# EAGLE board swarm-agg1a (EAGLE 4.16)
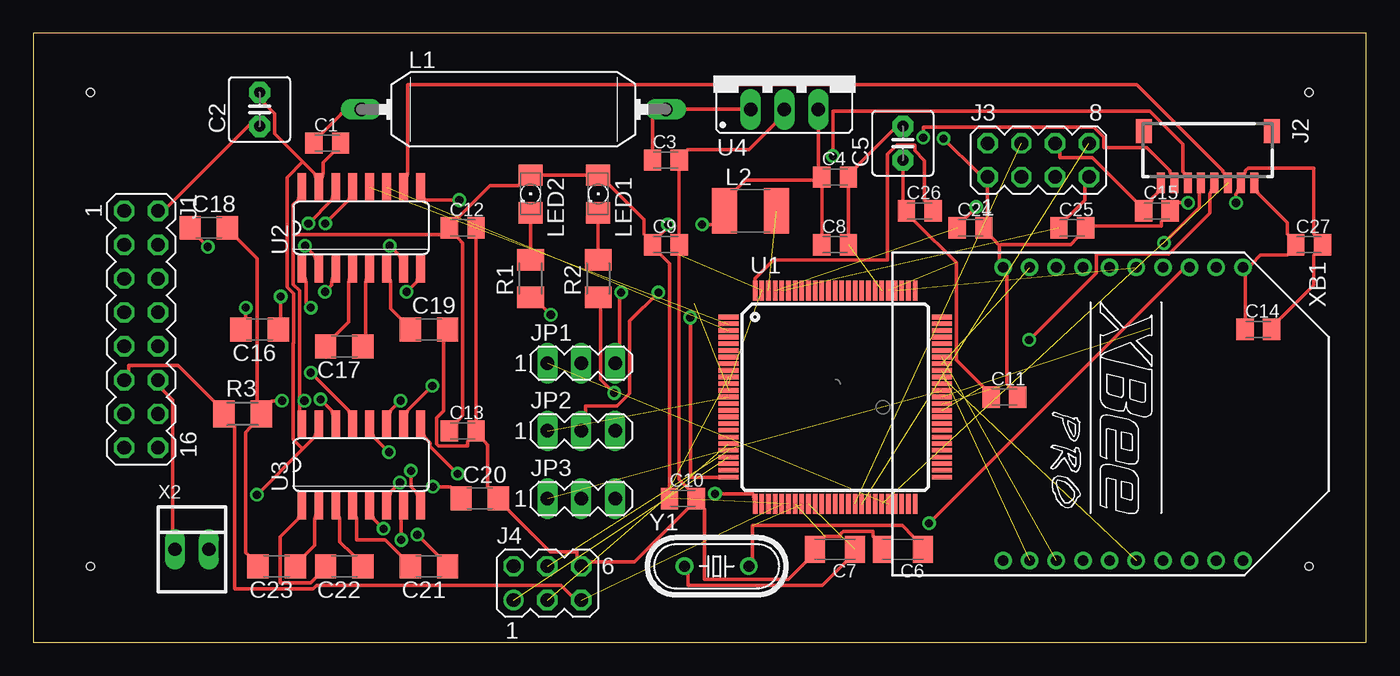
[diagram p0: board, top side]
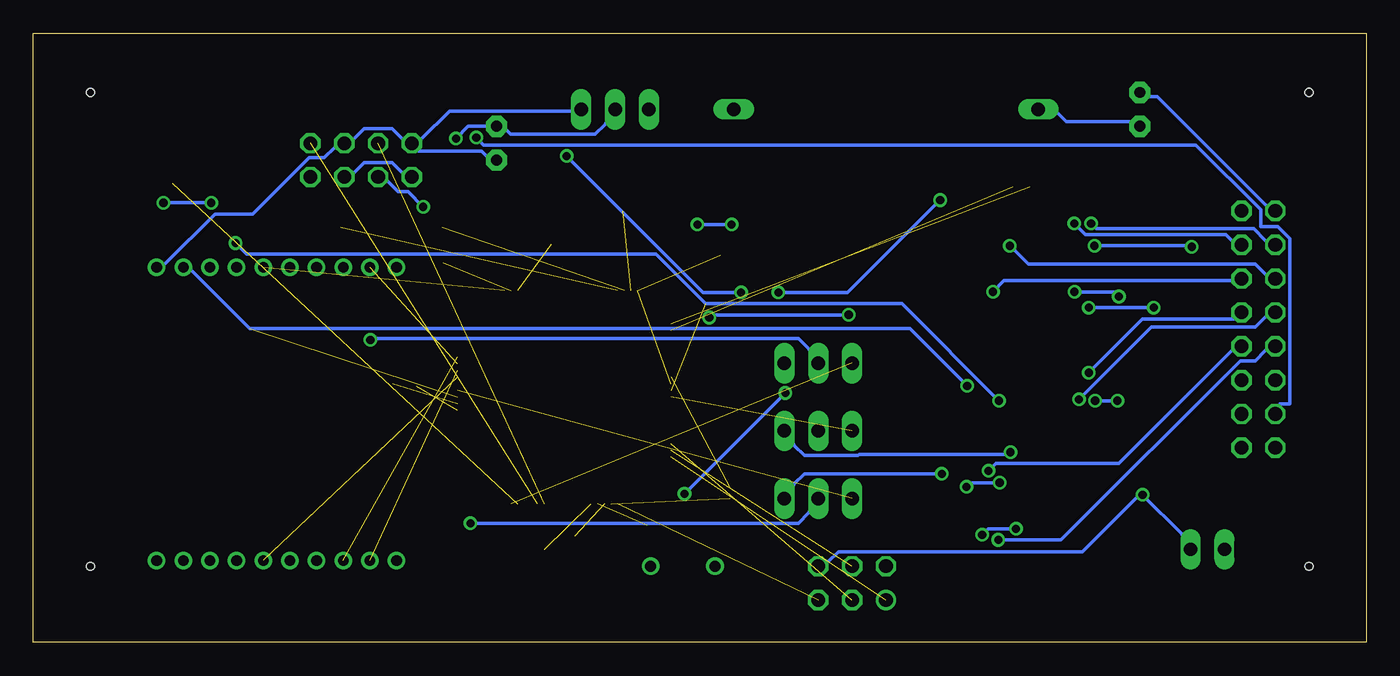
[diagram p1: board, bottom side, seen from below]

Size 100 x 45.71 mm. Coordinates in mm from the lower left corner, seen from the top.
Outline: 0,0 100,0 100,45.71 0,45.71 0,0
Copper layers (1*16): Top 0.035mm / dielectric 1.5mm / Bottom 0.035mm
Design rules "default": minimum track width 10mil, minimum drill 24mil, track to track 8mil, track to pad 8mil, pad to pad 8mil, via to via 8mil, smd to smd 8mil, copper to edge 40mil, drill to drill 8mil, minimum pad ring 10mil, minimum via ring 8mil, stop-mask expansion 4mil, vias tented up to drill 0mil, thermal gap 10mil
Holes 0.6 mm at 4.28,5.71 4.28,41.27 95.72,41.27 95.72,5.71

## Footprints (pad centres in the part's own frame; a part is rotated, then mirrored left to right if it is on the bottom)
C0805K = smd 1.3 x 1.6: 1 -1,0; 2 1,0
C2.5-5 = drill 0.813 pad 1.6 octagon: 1 -1.27,0; 2 1.27,0
C1206K = smd 1.5 x 2: 1 -1.5,0; 2 1.5,0
C1206 = smd 1.6 x 1.8: 1 -1.4,0; 2 1.4,0
MA08-2 = drill 1.016 octagon: 1 -8.89,-1.27; 2 -8.89,1.27; 3 -6.35,-1.27; 4 -6.35,1.27; 5 -3.81,-1.27; 6 -3.81,1.27; 7 -1.27,-1.27; 8 -1.27,1.27; 9 1.27,-1.27; 10 1.27,1.27; 11 3.81,-1.27; 12 3.81,1.27; 13 6.35,-1.27; 14 6.35,1.27; 15 8.89,-1.27; 16 8.89,1.27
SM08B-SRSS-TB = smd 0.6 x 1.55: 1 -3.5,2.975; 2 -2.5,2.975; 3 -1.5,2.975; 4 -0.5,2.975; 5 0.5,2.975; 6 1.5,2.975; 7 2.5,2.975; 8 3.5,2.975 | smd 1.2 x 1.8: FIT@1 -4.8,-0.9; FIT@2 4.8,-0.9
MA04-2 = drill 1.016 octagon: 1 -3.81,-1.27; 2 -3.81,1.27; 3 -1.27,-1.27; 4 -1.27,1.27; 5 1.27,-1.27; 6 1.27,1.27; 7 3.81,-1.27; 8 3.81,1.27
MA03-2 = drill 1.016 round: 1 -2.54,-1.27 | drill 1.016 octagon: 2 -2.54,1.27; 3 0,-1.27; 4 0,1.27; 5 2.54,-1.27; 6 2.54,1.27
MA03-1 = drill 1.016 long: 1 -2.54,0; 2 0,0; 3 2.54,0
SUKW2-22 = drill 1.016 long: 1 -11.43,0; 2 11.43,0
L1812 = smd 1.9 x 3.4: 1 -1.95,0; 2 1.95,0
1206 = smd 1.6 x 1.803: A -1.422,0; C 1.422,0
M1206 = smd 1.6 x 2: 1 -1.4,0; 2 1.4,0
TQFP100 = smd 1.5 x 0.35: 1 -8,6; 2 -8,5.5; 3 -8,5; 4 -8,4.5; 5 -8,4; 6 -8,3.5; 7 -8,3; 8 -8,2.5; 9 -8,2; 10 -8,1.5; 11 -8,1; 12 -8,0.5; 13 -8,0; 14 -8,-0.5; 15 -8,-1; 16 -8,-1.5; 17 -8,-2; 18 -8,-2.5; 19 -8,-3; 20 -8,-3.5; 21 -8,-4; 22 -8,-4.5; 23 -8,-5; 24 -8,-5.5; 25 -8,-6; 51 8,-6; 52 8,-5.5; 53 8,-5; 54 8,-4.5; 55 8,-4; 56 8,-3.5; 57 8,-3; 58 8,-2.5; 59 8,-2; 60 8,-1.5; 61 8,-1; 62 8,-0.5; 63 8,0; 64 8,0.5; 65 8,1; 66 8,1.5; 67 8,2; 68 8,2.5; 69 8,3; 70 8,3.5; 71 8,4; 72 8,4.5; 73 8,5; 74 8,5.5; 75 8,6 | smd 0.35 x 1.5: 26 -6,-8; 27 -5.5,-8; 28 -5,-8; 29 -4.5,-8; 30 -4,-8; 31 -3.5,-8; 32 -3,-8; 33 -2.5,-8; 34 -2,-8; 35 -1.5,-8; 36 -1,-8; 37 -0.5,-8; 38 0,-8; 39 0.5,-8; 40 1,-8; 41 1.5,-8; 42 2,-8; 43 2.5,-8; 44 3,-8; 45 3.5,-8; 46 4,-8; 47 4.5,-8; 48 5,-8; 49 5.5,-8; 50 6,-8; 76 6,8; 77 5.5,8; 78 5,8; 79 4.5,8; 80 4,8; 81 3.5,8; 82 3,8; 83 2.5,8; 84 2,8; 85 1.5,8; 86 1,8; 87 0.5,8; 88 0,8; 89 -0.5,8; 90 -1,8; 91 -1.5,8; 92 -2,8; 93 -2.5,8; 94 -3,8; 95 -3.5,8; 96 -4,8; 97 -4.5,8; 98 -5,8; 99 -5.5,8; 100 -6,8
SO16 = smd 0.66 x 2.032: 1 -4.445,-3.073; 2 -3.175,-3.073; 3 -1.905,-3.073; 4 -0.635,-3.073; 5 0.635,-3.073; 6 1.905,-3.073; 7 3.175,-3.073; 8 4.445,-3.073; 9 4.445,3.073; 10 3.175,3.073; 11 1.905,3.073; 12 0.635,3.073; 13 -0.635,3.073; 14 -1.905,3.073; 15 -3.175,3.073; 16 -4.445,3.073
78XXS = drill 1.016 long: GND 0,-2.54; IN -2.54,-2.54; OUT 2.54,-2.54
22-23-2021 = drill 1 long: 1 -1.27,0; 2 1.27,0
XBEE-PRO = drill 0.8 pad 1.27 round: 1 -11,9; 2 -11,7; 3 -11,5; 4 -11,3; 5 -11,1; 6 -11,-1; 7 -11,-3; 8 -11,-5; 9 -11,-7; 10 -11,-9; 11 11,-9; 12 11,-7; 13 11,-5; 14 11,-3; 15 11,-1; 16 11,1; 17 11,3; 18 11,5; 19 11,7; 20 11,9
HC49/S = drill 0.813 round: 1 -2.413,0; 2 2.413,0

## Placement (x,y rotation side)
C1  0.1  [C0805K]  22.06,37.46 0 top
C2  220uF  [C2.5-5]  16.98,40 90 top
C3  0.1  [C0805K]  47.46,36.19 0 top
C4  0.1  [C0805K]  60.16,34.92 0 top
C5  10uF  [C2.5-5]  65.24,37.46 90 top
C6  22pF  [C1206K]  65.24,6.98 180 top
C7  22pF  [C1206K]  60.16,6.98 180 top
C8  0.1  [C0805K]  60.16,29.84 0 top
C9  0.1  [C0805K]  47.46,29.84 0 top
C10  0.1  [C0805K]  48.73,10.79 0 top
C11  0.1  [C0805K]  72.86,18.41 0 top
C12  0.1  [C0805K]  32.22,31.11 0 top
C13  0.1  [C0805K]  32.22,15.87 0 top
C14  0.1  [C0805K]  91.91,23.49 0 top
C15  0.1  [C0805K]  84.29,32.38 0 top
C16  1uF  [C1206]  16.98,23.49 180 top
C17  1uF  [C1206]  23.33,22.22 180 top
C18  1uF  [C1206]  13.17,31.11 0 top
C19  1uF  [C1206]  29.68,23.49 0 top
C20  1uF  [C1206]  33.49,10.79 0 top
C21  1uF  [C1206]  29.68,5.71 180 top
C22  1uF  [C1206]  23.33,5.71 180 top
C23  1uF  [C1206]  18.25,5.71 180 top
C24  0.1  [C0805K]  70.32,31.11 0 top
C25  0.1  [C0805K]  77.94,31.11 0 top
C26  0.1  [C0805K]  66.51,32.38 0 top
C27  0.1  [C0805K]  95.72,29.84 0 top
J1  [MA08-2]  8.09,23.49 270 top
J2  SM08B-SRSS-TB  [SM08B-SRSS-TB]  88.1,37.46 180 top
J3  [MA04-2]  75.4,36.19 0 top
J4  [MA03-2]  38.57,4.44 0 top
JP1  [MA03-1]  41.11,20.95 0 top
JP2  [MA03-1]  41.11,15.87 0 top
JP3  [MA03-1]  41.11,10.79 0 top
L1  100uH  [SUKW2-22]  36.03,40 0 top
L2  10uH  [L1812]  53.81,32.38 0 top
LED1  [1206]  42.38,33.65 270 top
LED2  [1206]  37.3,33.65 270 top
R1  330  [M1206]  37.3,27.3 90 top
R2  330  [M1206]  42.38,27.3 90 top
R3  1k  [M1206]  15.71,17.14 0 top
U1  MEGA640  [TQFP100]  60.16,18.41 0 top
U2  MAX3232CSE  [SO16]  24.6,31.11 0 top
U3  MAX3232CSE  [SO16]  24.6,13.33 0 top
U4  7805  [78XXS]  56.35,42.54 0 top
X2  22-23-2021  [22-23-2021]  11.9,6.98 0 top
XB1  XBEE-PRO  [XBEE-PRO]  81.75,17.14 270 top
Y1  14.7456 MHz  [HC49/S]  51.27,5.71 0 top

## Library data of the parts
C1 C3 C4 C6-C27 L2 R1-R3 = rcl
C2 C5 = capacitor-wima
J1 J3 J4 JP1-JP3 = con-lstb
J2 = con-jst2
L1 = inductors
LED1 LED2 = led
U1 = atmel-tad
U2 U3 = maxim
U4 = v-reg
X2 = con-molex
XB1 = maxstream
Y1 = crystal

## Nets
GND: C1.2 C2.2 C3.2 C4.2 C5.2 C6.2 C7.2 C8.2 C9.2 C10.2 C11.2 C12.2 C13.2 C14.2 C15.2 C19.2 C20.2 C24.2 C25.2 C27.2 J1.1 J2.2 J3.1 J3.5 J4.6 U1.11 U1.32 U1.62 U1.81 U1.99 U2.15 U3.15 U4.GND X2.2 XB1.10
N$1: U1.3 U2.11
N$2: C26.2 U1.100
N$3: C16.2 U2.1
N$4: J1.3 U2.14
N$5: J1.4 U2.13
N$6: J1.5 U2.7
N$7: J1.6 U2.8
N$8: U1.2 U2.12
N$9: JP1.3 U2.9
N$10: J2.3 U1.45 U2.10
N$11: JP1.1 U1.46
N$12: J2.4 JP1.2
N$13: J1.7 U3.14
N$14: J1.8 U3.13
N$15: J2.5 U1.12 U3.11
N$16: C3.1 L1.2 U4.IN
N$17: C1.1 C2.1 J1.2 L1.1
N$18: C24.1 J3.3 U1.97
N$19: C25.1 J3.7 U1.96
N$20: J1.9 U3.7
N$21: J1.10 U3.8
N$22: J2.6 JP2.2
N$23: JP2.3 U3.12
N$24: JP3.3 U3.9
N$25: U1.63 U3.10 XB1.2
N$26: JP3.1 U1.64
N$27: JP3.2 XB1.3
N$28: JP2.1 U1.13
N$29: C6.1 U1.33 Y1.2
N$30: J4.1 U1.22
N$31: J4.3 U1.20
N$32: J1.12 X2.1
N$33: J1.11 J4.5 R3.1 U1.30
N$34: J4.4 U1.21
N$35: C7.1 U1.34 Y1.1
N$36: J3.4 U1.41
N$37: J3.8 U1.42
N$38: C16.1 U2.3
N$39: C17.2 U2.4
N$40: C17.1 U2.5
N$41: C19.1 U2.6
N$42: C18.1 U2.2
N$43: C23.1 U3.2
N$44: C20.1 U3.6
N$45: C21.1 U3.5
N$46: C21.2 U3.4
N$47: C22.1 U3.3
N$48: C22.2 U3.1
N$49: L2.2 U1.98
N$50: LED2.C R1.2
N$51: R1.1 U1.25
N$52: LED1.C R2.2
N$53: R2.1 U1.26
N$54: U1.79 XB1.5
N$55: U1.69 XB1.13
N$56: U1.68 XB1.9
N$57: U1.67 XB1.12
N$58: U1.66 XB1.16
N$59: J1.13 J2.7
VCC: C4.1 C5.1 C8.1 C9.1 C10.1 C11.1 C12.1 C13.1 C14.1 C15.1 C18.2 C23.2 C26.1 C27.1 J2.1 J2.8 J3.2 J3.6 L2.1 LED1.A LED2.A R3.2 U1.10 U1.31 U1.61 U1.80 U2.16 U3.16 U4.OUT XB1.1

## Tracks (layer width: path | path; a pad name or v marks a point on that pad's centre or on a via)
GND  (via drill 0.61)  (5 unrouted)
  Top 0.254: C8.2 61.15,30.63 61.15,34.13 C4.2 61.79,35.71 61.79,35.73 64.45,38.4 C5.2 | U4.GND 55.61,38.91 53.68,36.98 49.09,36.98 C3.2 48.45,35.4 48.45,30.63 C9.2 48.45,29.05 48.45,12.21 49.09,11.58 C10.2 | C14.2 93.54,24.28 96.08,26.82 96.08,29.05 C27.2 96.08,30.63 96.08,35.61 91.15,35.61 90.94,35.4 90.94,35.3 90.89,35.25 J2.2 90.31,33.73 90.23,33.65 v90.23,32.99 | C11.2 73.22,19.2 73.04,19.38 73.04,27.5 XB1.10 72.48,28.77 72.48,29.79 | 72.48,29.79 71.95,30.32 C24.2 71.59,31.9 J3.1 70.85,35.25 v68.29,37.82 | 72.48,29.79 72.58,29.86 77.84,29.86 78.3,30.32 C25.2 79.57,31.24 84.65,31.24 84.65,31.59 C15.2 85.92,32.99 v86.65,32.99 | v16.78,11.07 20.22,14.51 | 20.22,14.51 21.12,15.41 U3.15 | C1.2 22.42,36.67 21.73,35.99 21.73,35.17 U2.15 21.12,35.17 20.22,36.08 | 20.22,36.08 18.12,38.17 18.12,39.67 17.31,40.48 C2.2 | 20.22,14.51 19.49,15.24 19.49,22.42 19.52,22.45 19.52,26.18 19.04,26.66 19.04,34.9 20.22,36.08 | C13.2 33.85,15.08 34.1,14.83 34.1,11.68 C20.2 35.67,9.9 38.77,6.8 40.78,6.8 40.78,6.45 J4.6 41.85,6.04 45.12,6.04 49.09,10 C10.2 | C12.2 33.21,30.32 33.21,16.66 C13.2 | C19.2 30.77,22.6 30.77,17.37 30.24,16.83 30.24,14.91 30.42,14.73 32.58,14.73 32.58,15.08 C13.2 | C6.2 63,7.97 63,8.33 60.77,8.33 60.57,8.12 60.57,7.97 59.4,7.97 C7.2 57.92,5.99 56.66,4.72 50.36,4.72 50.36,10 C10.2
  Bottom 0.254: U4.GND 57.09,38.91 57.85,38.15 64.2,38.15 64.45,38.4 C5.2 67.37,38.73 v68.29,37.82 | J3.5 75.93,35.25 75.17,36.01 73.09,36.01 72.33,35.25 J3.1 | v86.65,32.99 v90.23,32.99 | X2.2 13.83,8.12 v16.78,11.07 17.26,10.84 21.3,6.8 39.61,6.8 40.37,6.04 J4.6 | J1.1 7.51,32.76 15.69,40.94 16.19,40.94 C2.2
N$1  (1 unrouted)
N$2
  Top 0.254: U1.100 54.14,27.15 54.14,27.3 55.54,28.7 64.1,28.7 64.1,36.65 64.78,37.33 66.13,37.33 66.13,36.9 66.87,36.16 66.87,33.17 C26.2
N$3  (via drill 0.61)
  Top 0.254: v15.94,25.12 15.94,24.38 C16.2 | v20.81,25.12 20.46,25.47 20.46,27.05 U2.1
  Bottom 0.254: v15.94,25.12 v20.81,25.12
N$4  (via drill 0.61)
  Top 0.254: v20.64,31.44 22.39,33.19 U2.14
  Bottom 0.254: v20.64,31.44 20.26,31.06 8.45,31.06 7.56,30.17 J1.3
N$5  (via drill 0.61)
  Top 0.254: v21.91,31.44 23.66,33.19 U2.13
  Bottom 0.254: v21.91,31.44 21.07,30.6 10.53,30.6 10.1,30.17 J1.4
N$6  (via drill 0.61)
  Top 0.254: v26.73,29.76 27.47,29.03 U2.7
  Bottom 0.254: v26.73,29.76 25.36,28.39 8.32,28.39 7.56,27.63 J1.5
N$7  (via drill 0.61)
  Top 0.254: v28,26.31 28.74,27.05 U2.8
  Bottom 0.254: v28,26.31 27.16,27.15 10.1,27.15 J1.6
N$8  (1 unrouted)
N$9  (via drill 0.61)
  Top 0.254: v31.97,33.19 29.35,33.19 U2.9 | v44.11,26.26 43.98,26.13 43.98,22.45 JP1.3
  Bottom 0.254: v31.97,33.19 38.9,26.26 v44.11,26.26
N$10  (1 unrouted)
  Top 0.254: J2.3 89.32,35.25 89.24,35.33 89.24,35.4 82.79,41.85 28.08,41.85 28.08,35.17 U2.10
N$11  (1 unrouted)
N$12  (via drill 0.61)
  Top 0.254: v74.71,22.7 79.74,27.73 79.74,29.13 85.18,29.13 88.25,32.2 88.25,33.68 88.3,33.73 J2.4
  Bottom 0.254: v74.71,22.7 74.61,22.8 42.61,22.8 41.85,22.04 JP1.2
N$13  (via drill 0.61)
  Top 0.254: v21.55,18.23 22.39,17.39 U3.14
  Bottom 0.254: v21.55,18.23 16.12,23.67 8.32,23.67 7.56,24.43 J1.7
N$14  (via drill 0.61)
  Top 0.254: v20.81,20.24 23.66,17.39 U3.13
  Bottom 0.254: v20.81,20.24 16.78,24.28 9.94,24.28 J1.8
N$15  (via drill 0.61)  (1 unrouted)
  Top 0.254: v84.82,29.97 87.49,32.63 87.49,33.73 J2.5 | v27.55,18.13 26.81,17.39 U3.11
  Bottom 0.254: v84.82,29.97 83.98,29.13 53.28,29.13 49.57,25.42 34.84,25.42 v27.55,18.13
N$16
  Top 0.254: C3.1 46.47,36.98 46.47,39.26 L1.2 U4.IN
N$17
  Top 0.254: C1.1 21.7,38.25 23.1,39.64 23.1,39.67 L1.1 | J1.2 10.1,32.71 16.19,38.81 C2.1
  Bottom 0.254: L1.1 23.1,39.67 22.49,39.06 17.77,39.06 C2.1
N$18  (via drill 0.61)  (1 unrouted)
  Top 0.254: v70.75,32.69 69.96,31.9 C24.1
  Bottom 0.254: v70.75,32.69 71.89,33.83 72.63,33.83 73.39,34.59 J3.3
N$19  (1 unrouted)
  Top 0.254: C25.1 77.58,31.9 78.88,33.19 78.88,34.18 J3.7
N$20  (via drill 0.61)
  Top 0.254: v27.6,7.69 27.6,9.27 U3.7
  Bottom 0.254: v27.6,7.69 22.9,7.69 9.46,21.13 8.32,21.13 7.56,21.89 J1.9
N$21  (via drill 0.61)
  Top 0.254: v28.33,12.87 28.33,11.65 28.74,11.25 U3.8
  Bottom 0.254: v28.33,12.87 27.77,13.43 18.55,13.43 10.1,21.89 J1.10
N$22  (via drill 0.61)
  Top 0.254: v59.98,36.5 59.98,39.87 83.78,39.87 86.25,37.41 86.25,35.33 86.32,35.25 J2.6 | v46.9,26.26 44.74,24.1 44.74,18.69 43.78,17.72 41.44,17.72 41.44,17.37 JP2.2
  Bottom 0.254: v59.98,36.5 49.75,26.26 v46.9,26.26
N$23  (via drill 0.61)
  Top 0.254: v26.68,14.27 25.54,15.41 U3.12
  Bottom 0.254: v26.68,14.27 26.86,14.09 38.04,14.09 38.11,14.02 42.15,14.02 42.91,14.78 JP2.3
N$24  (via drill 0.61)
  Top 0.254: v31.84,12.64 29.78,14.7 29.78,14.98 29.35,15.41 U3.9
  Bottom 0.254: v31.84,12.64 42.15,12.64 42.91,11.88 JP3.3
N$25  (via drill 0.61)  (1 unrouted)
  Top 0.254: v29.93,19.25 28.08,17.39 U3.10
  Bottom 0.254: v29.93,19.25 34.23,23.54 83.76,23.54 88.1,27.88 XB1.2
N$26  (1 unrouted)
N$27  (via drill 0.61)
  Top 0.254: v67.2,8.94 86.12,27.86 XB1.3
  Bottom 0.254: v67.2,8.94 42.61,8.94 41.85,9.7 JP3.2
N$28  (1 unrouted)
N$29  (1 unrouted)
  Top 0.254: C6.1 66,7.97 65.19,8.78 53.96,8.78 53.96,6.34 Y1.2
N$30  (1 unrouted)
N$31  (1 unrouted)
N$32
  Top 0.254: X2.1 10.45,8.48 10.45,18.18 9.69,18.94 J1.12
N$33  (1 unrouted)
  Top 0.254: J1.11 7.15,20.42 7.15,20.77 10.88,20.77 13.53,18.13 R3.1 15.1,16.15 15.1,4.01 20.99,4.01 21.25,4.26 39.61,4.26 40.37,3.5 J4.5
N$34  (1 unrouted)
N$35  (1 unrouted)
  Top 0.254: C7.1 60.92,5.99 59.2,4.26 49.14,4.26 49.14,5.08 Y1.1
N$36  (1 unrouted)
N$37  (1 unrouted)
N$38  (via drill 0.61)
  Top 0.254: v18.55,25.95 18.55,24.38 C16.1 | v21.88,26.31 22.39,26.82 22.39,27.05 U2.3
  Bottom 0.254: v18.55,25.95 18.91,26.31 v21.88,26.31
N$39
  Top 0.254: C17.2 22.72,23.11 23.66,24.05 23.66,27.05 U2.4
N$40
  Top 0.254: C17.1 24.93,23.11 24.93,27.05 U2.5
N$41
  Top 0.254: C19.1 27.5,24.38 26.81,25.06 26.81,27.05 U2.6
N$42  (via drill 0.61)
  Top 0.254: v13.09,29.69 12.56,30.22 C18.1 | v20.38,29.76 21.12,29.03 U2.2
  Bottom 0.254: v13.09,29.69 13.17,29.76 v20.38,29.76
N$43
  Top 0.254: C23.1 20.43,6.6 21.12,7.29 21.12,9.27 U3.2
N$44  (via drill 0.61)
  Top 0.254: v29.98,11.68 31.31,11.68 C20.1 | v27.5,11.98 26.81,11.3 26.81,11.25 U3.6
  Bottom 0.254: v29.98,11.68 29.68,11.98 v27.5,11.98
N$45  (via drill 0.61)
  Top 0.254: v28.82,8.07 30.29,6.6 C21.1 | v26.28,8.53 25.54,9.27 U3.5
  Bottom 0.254: v28.82,8.07 28.36,8.53 v26.28,8.53
N$46
  Top 0.254: C21.2 27.5,6.6 26.4,7.69 24.27,7.69 24.27,9.27 U3.4
N$47
  Top 0.254: C22.1 23.94,6.6 23,7.54 23,9.27 U3.3
N$48
  Top 0.254: C22.2 21.15,4.82 20.79,4.46 18.5,4.46 18.5,7.92 19.85,9.27 U3.1
N$49  (1 unrouted)
N$50
  Top 0.254: R1.2 LED2.C
N$51  (via drill 0.61)
  Top 0.254: v49.29,24.38 49.29,12.39 51.42,12.39 U1.25 | v38.82,24.58 38.29,25.12 R1.1
  Bottom 0.254: v49.29,24.38 49.09,24.58 v38.82,24.58
N$52
  Top 0.254: R2.2 LED1.C
N$53  (via drill 0.61)
  Top 0.254: v51.14,11.15 53.99,11.15 U1.26 | v43.57,18.71 42.56,19.73 42.56,25.12 R2.1
  Bottom 0.254: v43.57,18.71 v51.14,11.15
N$54  (1 unrouted)
N$55  (1 unrouted)
N$56  (1 unrouted)
N$57  (1 unrouted)
N$58  (1 unrouted)
N$59  (via drill 0.61)
  Top 0.254: v66.76,37.89 66.76,38.65 79.57,38.65 80.3,37.92 80.3,37.13 83.53,37.13 85.25,35.4 85.25,35.3 85.31,35.25 J2.7
  Bottom 0.254: v66.76,37.89 66.2,37.33 12.76,37.33 7.91,32.48 7.91,31.19 6.62,31.19 5.73,30.3 5.73,17.88 6.49,17.88 J1.13
VCC  (via drill 0.61)  (4 unrouted)
  Top 0.254: C18.2 15.35,30.22 16.78,28.8 16.78,18.13 R3.2 | C23.2 16.07,6.6 15.94,6.73 15.94,15.77 16.32,16.15 R3.2 | 19.98,18.13 19.98,26.39 19.49,26.87 19.49,30.6 | 19.98,18.13 19.98,17.39 U3.16 | 19.49,30.6 19.49,32.84 19.85,33.19 U2.16 | C13.1 31.86,16.66 32.22,17.01 32.22,29.97 31.86,30.32 C12.1 | C10.1 47.74,11.58 47.74,28.42 47.1,29.05 C9.1 | C9.1 45.83,30.63 45.83,31.72 43.27,34.29 LED1.A 41.49,35.07 38.19,35.07 LED2.A 36.41,34.29 34.25,34.29 31.86,31.9 C12.1 | 19.49,30.6 30.59,30.6 C12.1 | v18.66,18.13 17.89,18.13 R3.2 | v20.33,18.13 19.98,18.13 | C11.1 71.23,19.2 69.25,21.18 69.25,28.49 66.15,31.59 C26.1 65.24,33.17 C5.1 | C8.1 59.17,30.63 59.17,34.13 C4.1 | U4.OUT 58.89,35.71 C4.1 | C4.1 58.53,34.69 53.43,34.69 52.79,34.06 L2.1 50.91,31.36 v50.18,31.36 | C14.1 90.92,24.28 90.92,27.5 XB1.1 91.4,28.39 92.06,29.05 94.09,29.05 C27.1 94.09,30.63 94.09,31.52 91.89,33.73 J2.1 | J2.8 84.31,33.73 83.93,33.35 83.93,33.17 C15.1 82.66,33.17 79.46,36.37 77,36.37 77,36.72 J3.6 | v47.61,31.36 47.61,31.13 47.1,30.63 C9.1
  Bottom 0.254: v18.66,18.13 v20.33,18.13 | J3.2 72.33,37.79 73.09,38.55 75.17,38.55 75.93,37.79 J3.6 77.41,37.13 78.17,36.37 79.31,36.37 83.53,32.15 86.37,32.15 90.11,28.42 XB1.1 | U4.OUT 59.63,39.87 68.77,39.87 70.85,37.79 J3.2 | C5.1 66.03,36.52 66.38,36.88 71.11,36.88 J3.2 | v47.61,31.36 v50.18,31.36